# EAGLE board pcb_layout_light (EAGLE 9.2.2)
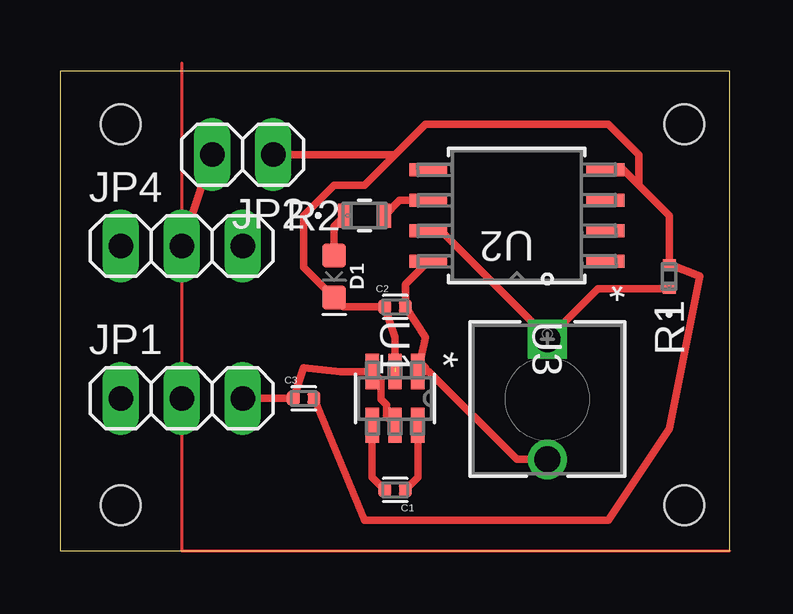
[diagram p0: board, top side]

Size 27.92 x 19.99 mm. Coordinates in mm from the lower left corner, seen from the top.
Outline: 0,0 27.92,0 27.92,19.99 0,19.99 0,0
Copper layers (1*16): Top 0.035mm / dielectric 1.5mm / Bottom 0.035mm
Design rules "default": minimum track width 6mil, minimum drill 0.35mm, track to track 6mil, track to pad 6mil, pad to pad 6mil, via to via 6mil, smd to smd 6mil, copper to edge 40mil, drill to drill 6mil, minimum pad ring 10mil, minimum via ring 8mil, stop-mask expansion 4mil, vias tented up to drill 0mil, thermal gap 10mil
Holes 1.65 mm at 26.03,17.78 2.54,17.78 26.03,1.91 2.54,1.91

## Footprints (pad centres in the part's own frame; a part is rotated, then mirrored left to right if it is on the bottom)
CAPC1005X55N = smd 0.54 x 0.6: 1 -0.43,0; 2 0.43,0
LED-0603 = smd 1 x 1: A -0.877,0; C 0.877,0
1X03 = drill 1.016 long: 1 -2.54,0; 2 0,0; 3 2.54,0
1X02 = drill 1.016 long: 1 -1.27,0; 2 1.27,0
RES_0510 = smd 0.453 x 0.55: 1 -0.502,0; 2 0.502,0
RES_0816 = smd 0.553 x 1: 1 -0.827,0; 2 0.827,0
DBV6 = smd 1.473 x 0.559: 1 -1.118,0.95; 2 -1.118,0; 3 -1.118,-0.95; 4 1.118,-0.95; 5 1.118,0; 6 1.118,0.95
8S2 = smd 1.575 x 0.533: 1 -3.696,1.905; 2 -3.696,0.635; 3 -3.696,-0.635; 4 -3.696,-1.905; 5 3.696,-1.905; 6 3.696,-0.635; 7 3.696,0.635; 8 3.696,1.905
SWITCH_FSM4JRT = drill 1.092 pad 1.6 square: 1 -5.004,0 | drill 1.092 pad 1.6: 2 0,0

## Placement (x,y rotation side)
C1  GRJ155R60J106ME11D  [CAPC1005X55N]  13.97,2.54 180 top
C2  GRJ155R60J106ME11D  [CAPC1005X55N]  13.97,10.16 0 top
C3  GRJ155R60J106ME11D  [CAPC1005X55N]  10.16,6.35 0 top
D1  GREEN  [LED-0603]  11.43,11.43 270 top
JP1  [1X03]  5.08,6.35 0 top
JP2  [1X02]  7.62,16.51 180 top
JP4  [1X03]  5.08,12.7 0 top
R1  RR0510P-103-D  [RES_0510]  25.4,11.43 90 top
R2  RR0816P-112-D  [RES_0816]  12.7,13.97 0 top
U1  REG710NA-3.3/3K  [DBV6]  13.97,6.35 270 top
U2  ATTINY85V-10SU  [8S2]  19.05,13.97 180 top
U3  FSM8JRT  [SWITCH_FSM4JRT]  20.32,3.81 270 top

## Library data of the parts
C1-C3 = GRJ155R60J106ME11D; DESCRIPTION: Capacitor Ceramic Mlcc 0402 10uf 6.3v Smd; DIGI-KEY_PART_NUMBER: 490-13211-1-ND; DIGI-KEY_PURCHASE_URL: https://www.digikey.com/product-detail/en/murata-electronics-north-america/GRJ155R60J106ME11D/490-13211-1-ND/5877419?utm_source=snapeda&utm_medium=aggregator&utm_campaign=symbol; MF: Murata; MP: GRJ155R60J106ME11D; PACKAGE: 0402 Murata
D1 = SparkFun-LED; PROD_ID: DIO-00821
JP1 JP2 JP4 = pinhead
R1 = 10kresistor; MANUFACTURER_PART_NUMBER: RR0510P103D; VENDOR: Susumu
R2 = 1p1koSF; MANUFACTURER_PART_NUMBER: RR0816P112D; VENDOR: Susumu
U1 = voltage_reg; MANUFACTURER_PART_NUMBER: REG710NA3.33K; VENDOR: Texas Instruments
U2 = attiny85; MANUFACTURER_PART_NUMBER: ATTINY85V10SU; VENDOR: Atmel
U3 = button; MANUFACTURER_PART_NUMBER: FSM8JRT; VENDOR: TE Connectivity

## Nets
GND: C2.1 C3.2 D1.C JP2.1 R1.2 U1.2 U2.4
N$1: C2.2 U1.1 U2.8 U3.2
N$2: C1.1 U1.6
N$3: C1.2 U1.4
N$5: R1.1 U2.7 U3.1
N$6: D1.A R2.1
N$7: R2.2 U2.6
N$8: C3.1 JP1.3 U1.3 U1.5
N$10: JP2.2 JP4.2

## Tracks (layer width: path | path; a pad name or v marks a point on that pad's centre or on a via)
GND  (1 unrouted)
  Top 0.305: U2.4 23.49,15.88 24.13,15.24 | 24.13,15.24 25.4,13.97 R1.2 26.67,11.43 25.4,5.08 22.86,1.27 12.7,1.27 C3.2 | 24.13,15.24 24.13,16.51 22.86,17.78 15.24,17.78 13.97,16.51 | 13.97,16.51 12.7,15.24 11.43,15.24 10.16,13.97 10.16,11.82 D1.C 11.82,10.16 C2.1 13.97,8.89 13.97,7.62 | JP2.1 13.97,16.51
N$1
  Top 0.305: U1.1 15.39,7.47 19.05,3.81 U3.2 | 15.24,7.62 15.09,7.77 15.04,7.72 15.04,7.57 U1.1 | U2.8 14.4,11.11 C2.2 15.24,8.89 U1.1
N$2
  Top 0.305: C1.1 14.92,3.06 U1.6
N$3
  Top 0.305: U1.4 13.02,3.06 C1.2
N$5
  Top 0.305: U3.1 20.36,8.85 | 20.36,8.85 22.44,10.93 R1.1 | U2.7 15.88,13.34 20.36,8.85
N$6
  Top 0.305: D1.A 11.43,13.53 R2.1
N$7
  Top 0.305: R2.2 14.16,14.61 U2.6
N$8
  Top 0.305: U1.5 13.6,5.6 13.6,6.1 13.39,6.31 13.39,7.1 U1.3 11.71,7.47 10.16,7.62 C3.1 JP1.3
N$10
  Top 0.305: JP4.2 JP2.2
(copper drawn outside any net)
  shapes: Top area x2